# Altium PCB LM_HTR_001.PcbDoc
Units mm, origin at the board's own origin, x right, y up, seen from the top; angles counter-clockwise.
Board outline 60 x 70.1 mm, 4 copper layers (Top Layer, +5, +12, Bottom Layer), stack 0.778 mm thick; 41 components, 41 nets, 140 pads, 13 vias.
Unrouted connection lines stored in the file: 16.
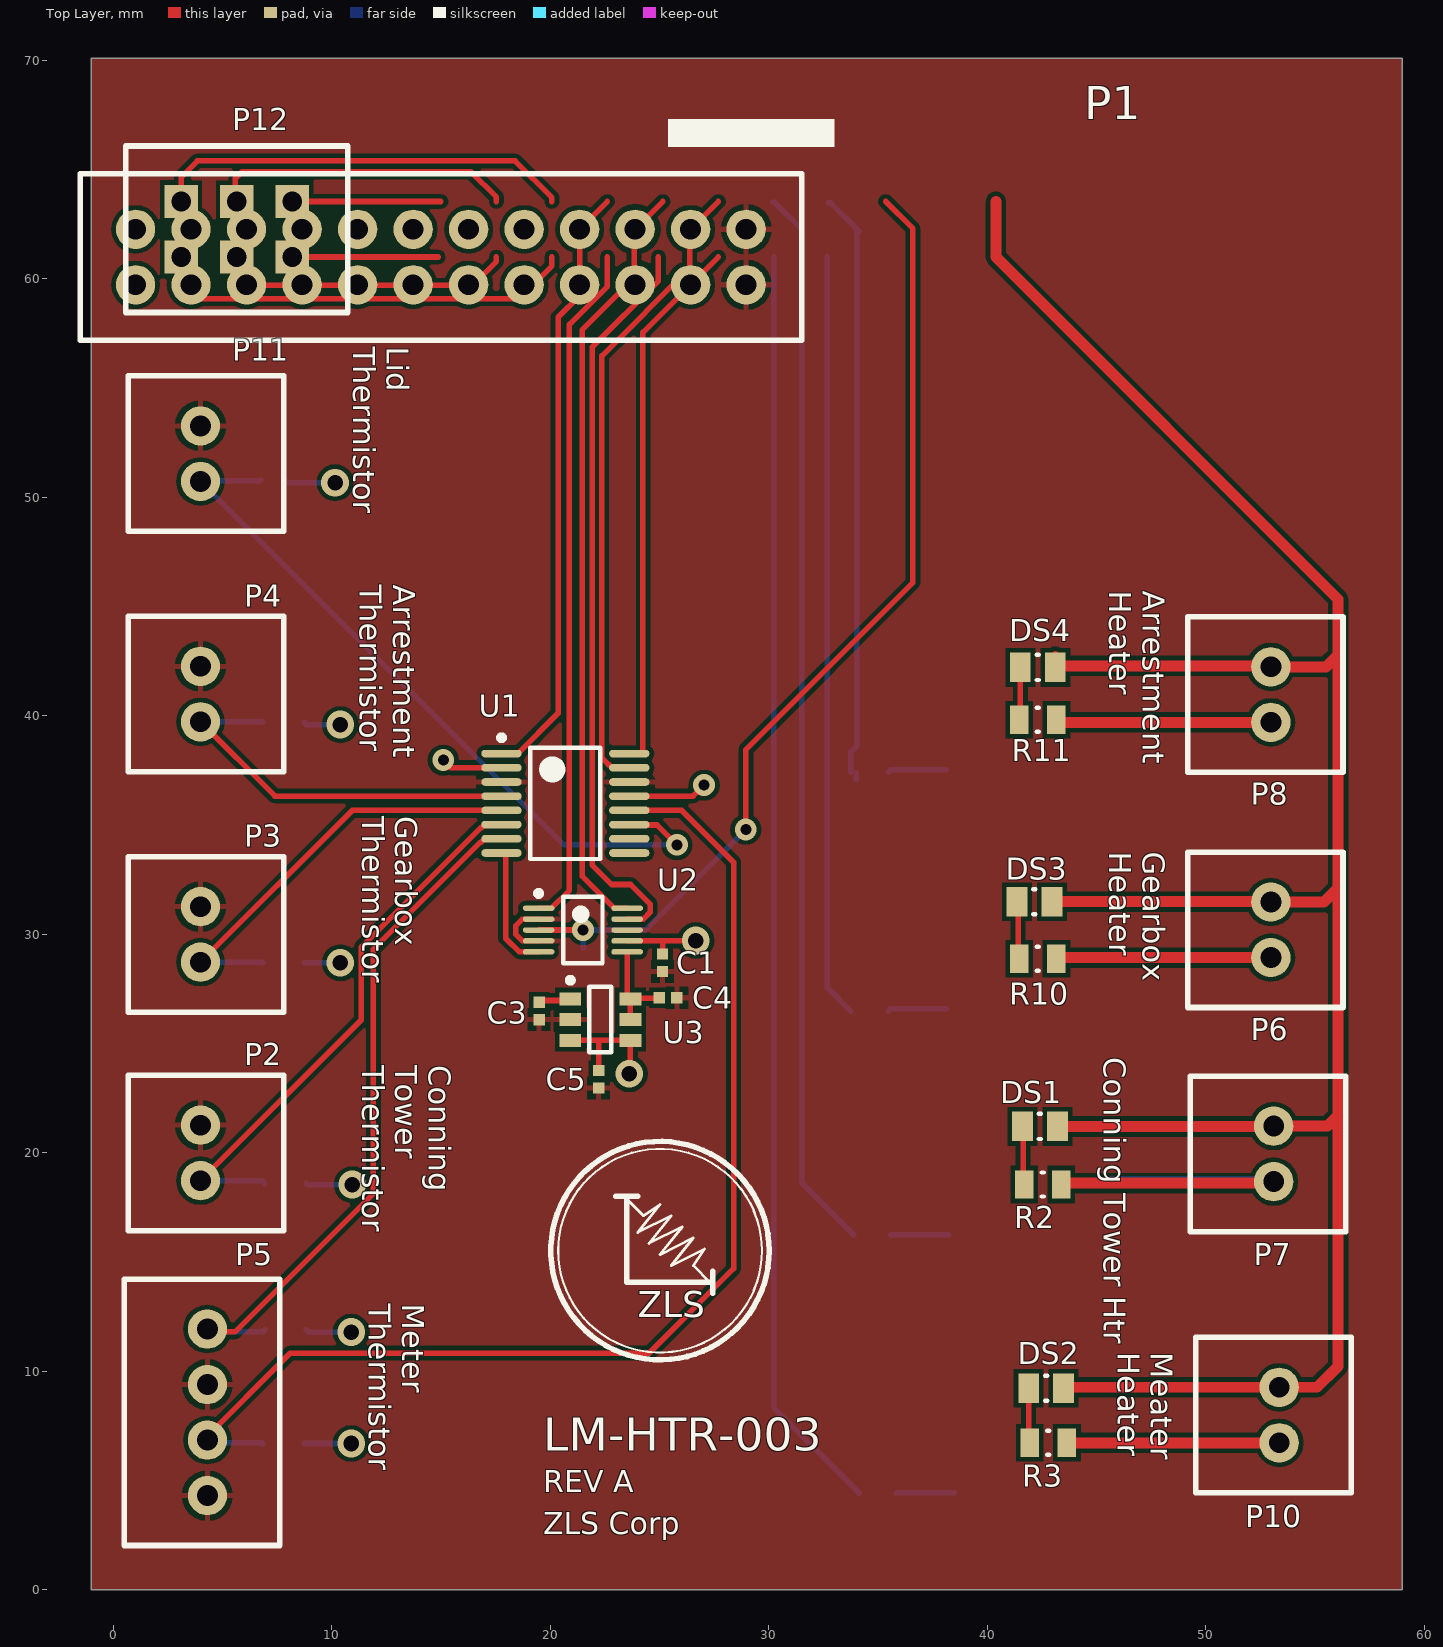
[diagram p0: Top Layer view]
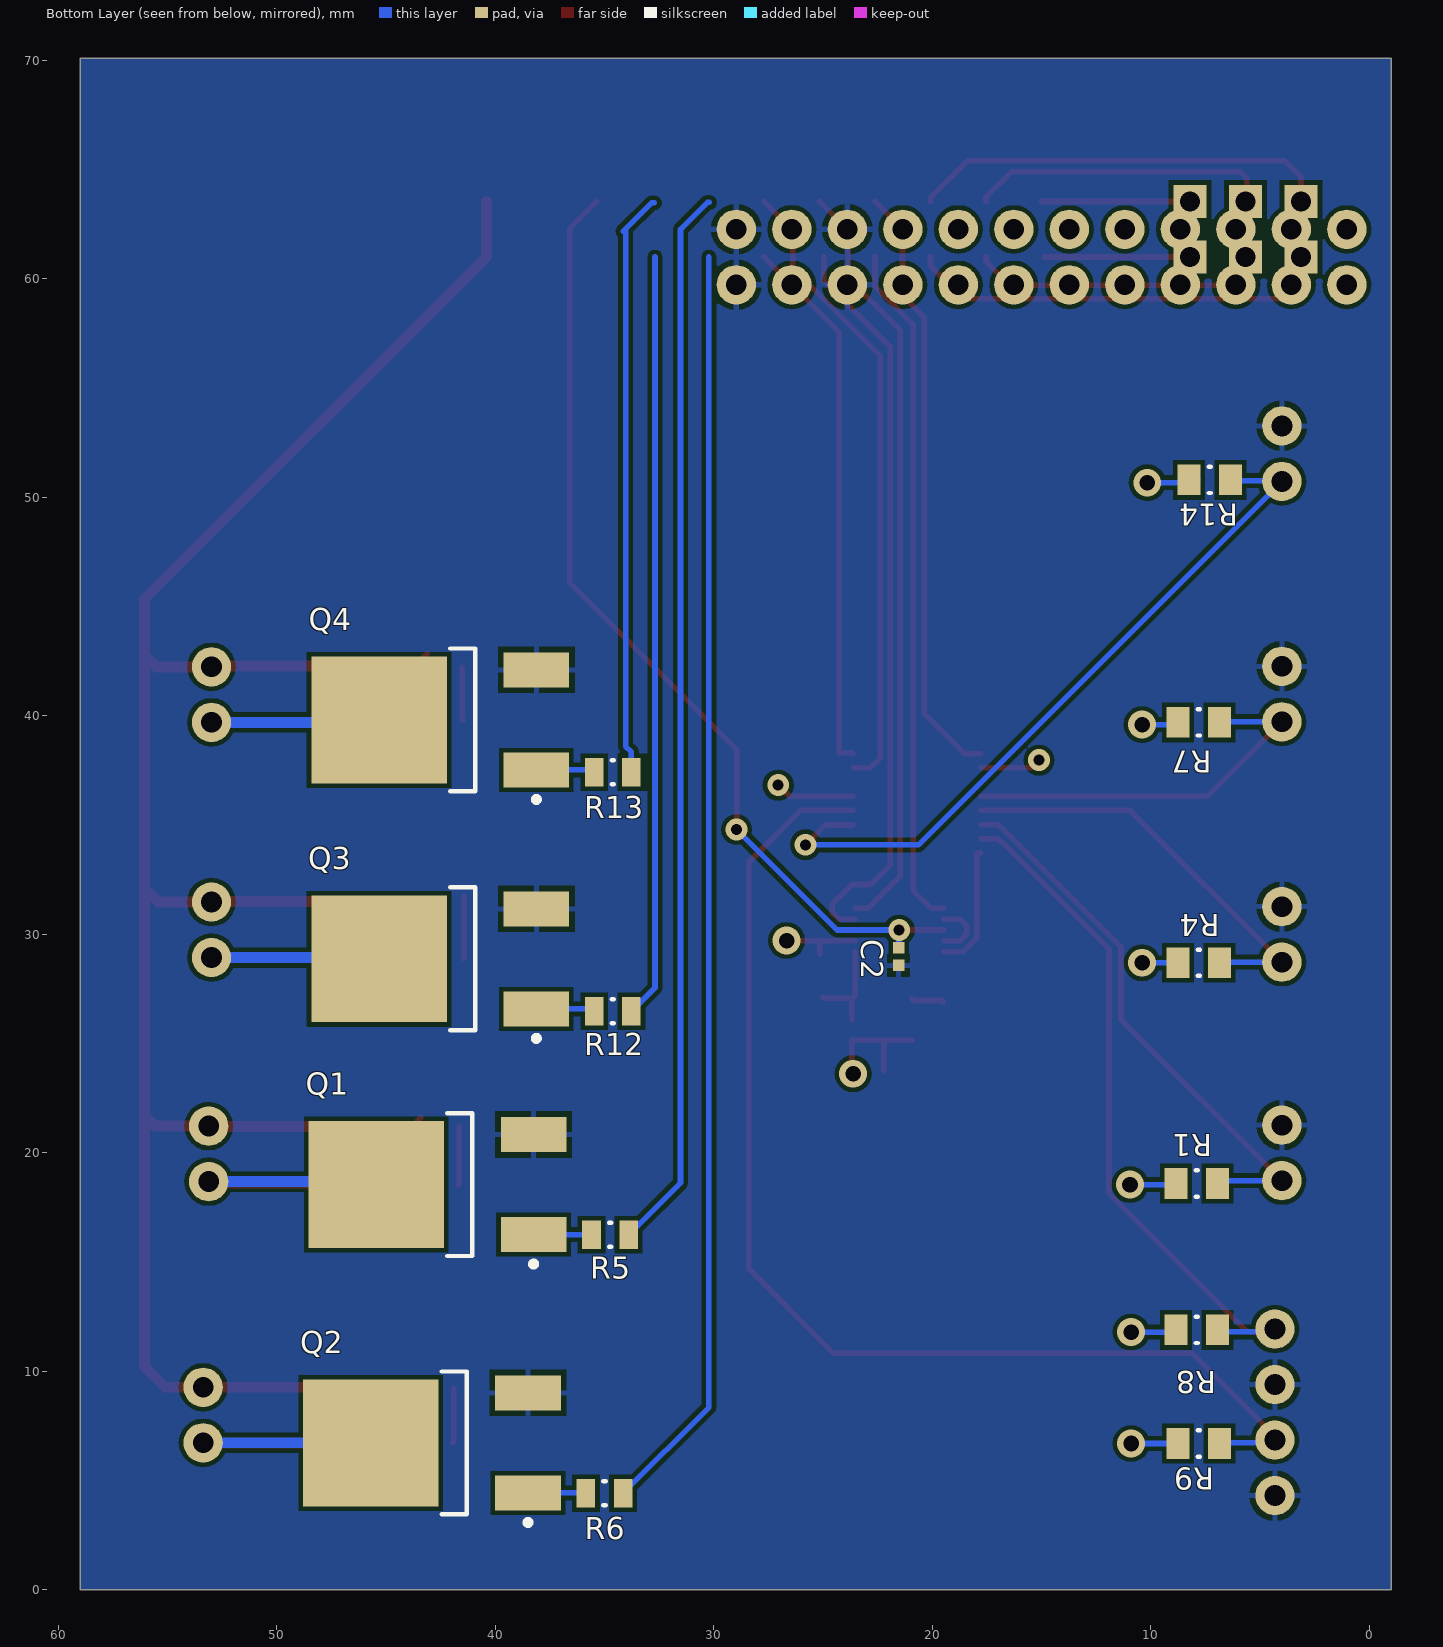
[diagram p1: Bottom Layer view, seen from below]
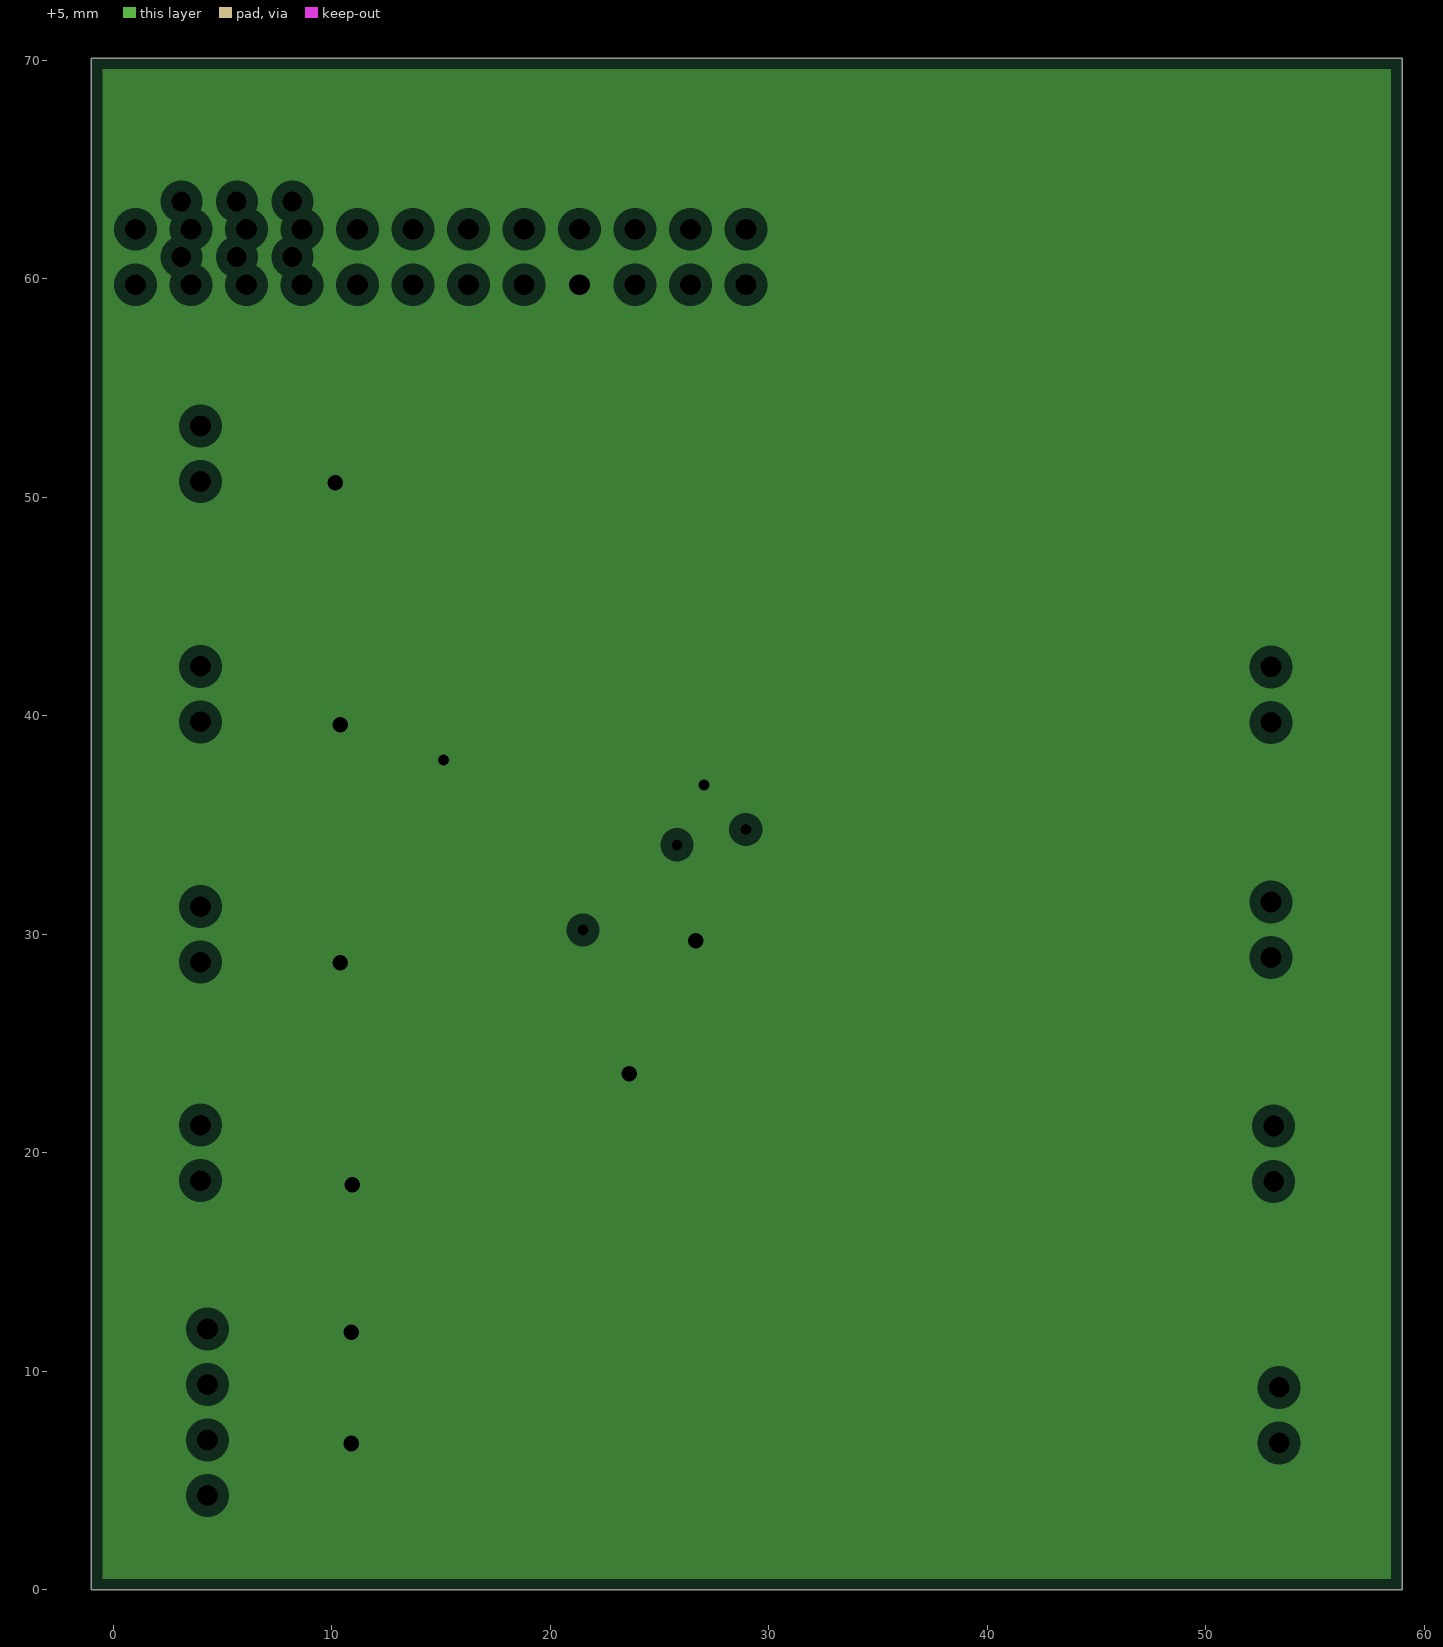
[diagram p2: +5, clearances drawn from the general rule]
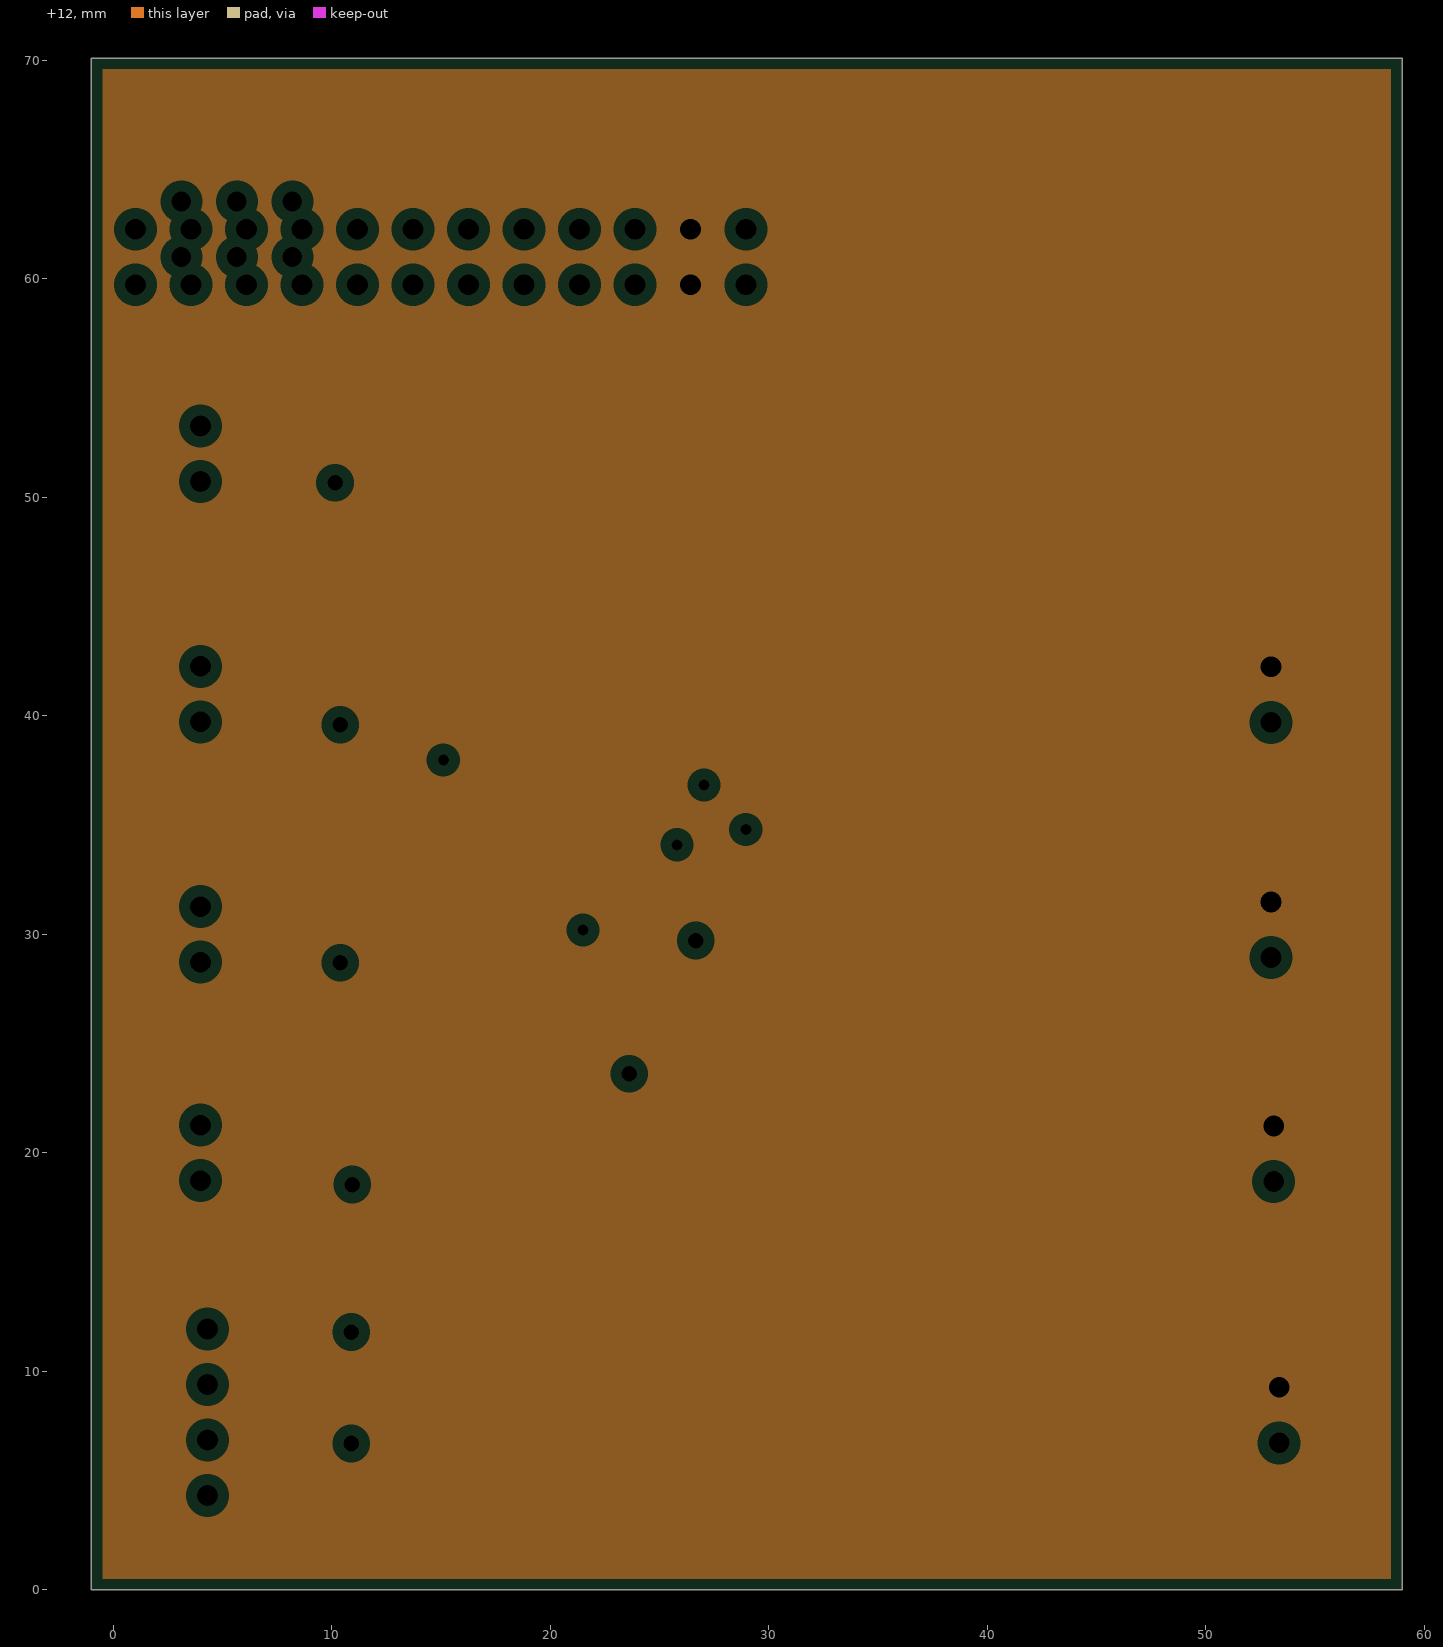
[diagram p3: +12, clearances drawn from the general rule]

## Layer stack, top to bottom
Top Solder: solder mask 0.0102, Solder Resist, Dk 3.5
Top Layer: signal copper 0.0356
Dielectric 1: core 0.254, FR-4, Dk 4.2
+5: plane copper 0.036, net +5
Dielectric 3: prepreg 0.127, Dk 4.2
+12: plane copper 0.036, net +12
Dielectric 2: core 0.254, Dk 4.2
Bottom Layer: signal copper 0.0356
Bottom Solder: solder mask 0.0102, Solder Resist, Dk 3.5

## Board outline
-1,0 59,0 59,70.104 -1,70.104

## Design rules (kind name [scope] priority, off if disabled: settings)
Clearance [All] p1: gap=0.2 ignorepadtopadclearanceinfootprint=FALSE
ComponentClearance [All] p1: gap=0 collisioncheckmode=3 verticalgap=0.254 showdistances=TRUE
MinimumSolderMaskSliver [All] p1: minsoldermaskwidth=0.045
PlaneClearance [All] p1: clearance=0.508
PlaneConnect [All] p1: planeconnectstyle=Relief reliefexpansion=0.508 reliefentries=4 reliefconductorwidth=0.254 reliefairgap=0.254
PolygonConnect [All] p1: connectstyle=Relief reliefconductorwidth=0.254 reliefentries=4 polygonreliefangle="90 Angle" airgapwidth=0.254
RoutingVias [All] p1: holewidth=0.711 width=1.27 viastyle="Through Hole" minholewidth=0.711 minwidth=1.27 maxholewidth=0.711 maxwidth=1.27
SilkToSilkClearance [All] p1: silktosilkclearance=0.127
SilkToSolderMaskClearance [IsPad] p1: minsilkscreentomaskgap=0.127 clearancetoexposedcopper=TRUE
SolderMaskExpansion [All] p1: expansion=0.102
Width [All] p1: maxlimit=0.762 minlimit=0.254 preferedwidth=0.254
24 further rules are at their usual default settings.

## Components (designator, comment, footprint, x,y, rotation, side; value= is the part's Value field where it differs from the comment)
C1 "0.1uF" CAPC0402(1005)60_L 25.146,28.702 r270 top
C2 "0.1uF" CAPC0402(1005)60_L 21.539,28.981 r270 bottom
C3 "0.1uF" CAPC0402(1005)60_L 19.5,26.5 r270 top
C4 "0.1uF" CAPC0402(1005)60_L 25.4,27.1 r180 top
C5 "0.1uF" CAPC0402(1005)60_L 22.225,23.368 r270 top
DS1 "Visible Name Value Type    False Description Lite-On LTST-S220KRKT Red LED, 631 nm 2012 (0805) Side View, Rectangle Lens SMD package STRING" 0805C_L 42.418,21.209 r180 top
DS2 "Visible Name Value Type    False Description Lite-On LTST-S220KRKT Red LED, 631 nm 2012 (0805) Side View, Rectangle Lens SMD package STRING" 0805C_L 42.7,9.228 r180 top
DS3 "Visible Name Value Type    False Description Lite-On LTST-S220KRKT Red LED, 631 nm 2012 (0805) Side View, Rectangle Lens SMD package STRING" 0805C_L 42.164,31.496 r180 top
DS4 "Visible Name Value Type    False Description Lite-On LTST-S220KRKT Red LED, 631 nm 2012 (0805) Side View, Rectangle Lens SMD package STRING" 0805C_L 42.319,42.216 r180 top
P1 "IPL1-112-01-F-S-K" IPL1-112-01-F-S-K 15,61 r0 top
P2 "IPL1-102-01-F-S-K" IPL1-102-01-F-S-K 4,20 r90 top
P3 "IPL1-102-01-F-S-K" IPL1-102-01-F-S-K 4,30 r90 top
P4 "IPL1-102-01-F-S-K" IPL1-102-01-F-S-K 4,41 r90 top
P5 "Header 4" IPL1-104-01-L-S-K 4.318,8.128 r270 top
P6 "IPL1-102-01-F-S-K" IPL1-102-01-F-S-K 52.986,30.211 r270 top
P7 "IPL1-102-01-F-S-K" IPL1-102-01-F-S-K 53.113,19.955 r270 top
P8 "IPL1-102-01-F-S-K" IPL1-102-01-F-S-K 52.986,40.974 r270 top
P10 "IPL1-102-01-F-S-K" IPL1-102-01-F-S-K 53.367,8.004 r270 top
P11 "IPL1-102-01-F-S-K" IPL1-102-01-F-S-K 4,52 r90 top
P12 "IPL1-103-01-F-D" IPL1-103-01-F-D 3.125,61 r0 top
Q1 "NTD4804NT4G" ONSC-DPAK-3-369AA-01_V 42.646,18.552 r0 bottom
Q2 "NTD4804NT4G" ONSC-DPAK-3-369AA-01_V 42.9,6.728 r0 bottom
Q3 "NTD4804NT4G" ONSC-DPAK-3-369AA-01_V 42.519,28.88 r0 bottom
Q4 "NTD4804NT4G" ONSC-DPAK-3-369AA-01_V 42.519,39.816 r0 bottom
R1 "6K98 1% 0805(2012)" RESC0805(2012)_N 7.9,18.6 r0 bottom
R2 "" RESC0805(2012)_L 42.546,18.552 r180 top
R3 "" RESC0805(2012)_L 42.8,6.728 r0 top
R4 "6K98 1% 0805(2012)" RESC0805(2012)_N 7.8,28.7 r0 bottom
R5 "" RESC0805(2012)_L 34.746,16.252 r0 bottom
R6 "" RESC0805(2012)_L 35,4.428 r0 bottom
R7 "6K98 1% 0805(2012)" RESC0805(2012)_N 7.8,39.7 r180 bottom
R8 "6K98 1% 0805(2012)" RESC0805(2012)_N 7.9,11.9 r180 bottom
R9 "6K98 1% 0805(2012)" RESC0805(2012)_N 7.8,6.7 r0 bottom
R10 "" RESC0805(2012)_L 42.319,28.88 r180 top
R11 "" RESC0805(2012)_L 42.319,39.816 r0 top
R12 "" RESC0805(2012)_L 34.619,26.48 r0 bottom
R13 "" RESC0805(2012)_L 34.619,37.416 r0 bottom
R14 "6K98 1% 0805(2012)" RESC0805(2012)_N 7.3,50.8 r180 bottom
U1 "ADG1608BRUZ" ADI-RU-16_M 20.7,36 r0 top
U2 "MAX11100EUB+T" U10+2_L 21.5,30.2 r0 top
U3 "MAX6070AAUT41+T" SOT95P280X445-6N 22.3,26.1 r0 top

## Footprints (in the part's own frame and the unit in brackets; to place one, negate y for a bottom-side part, rotate by r counter-clockwise, add the part's x,y. Pads: shape width x height; smd on the part's side, far side on the other; paste and mask are expansions set on the pad)
0805C_L [mm]
  rect 0.95x1.35 smd: 1(-0.8,0) 2(0.8,0)
  silkscreen extent -0.05,-0.58 0.05,0.58, body extent -1.1,-0.72 1.1,0.72, height 0.75
ADI-RU-16_M [mm] "SOP, 16-Leads, Body 5x4.4mm, Pitch 0.65mm, IPC Low Density"
  oval 1.85x0.35 smd: 1(-2.925,2.275) 2(-2.925,1.625) 3(-2.925,0.975) 4(-2.925,0.325) 5(-2.925,-0.325) 6(-2.925,-0.975) 7(-2.925,-1.625) 8(-2.925,-2.275) 9(2.925,-2.275) 10(2.925,-1.625) 11(2.925,-0.975) 12(2.925,-0.325) 13(2.925,0.325) 14(2.925,0.975) 15(2.925,1.625) 16(2.925,2.275)
  silkscreen extent -3.05,-2.55 1.6,3.12, body extent -2.25,-2.55 2.25,2.55, height 1.2
CAPC0402(1005)60_L [mm] "Chip Capacitor, Body 1.0x0.5mm, Height 0.6mm, IPC High Density"
  rect 0.52x0.52 smd: 1(-0.4,0) 2(0.4,0)
  body extent -0.55,-0.3 0.55,0.3, height 0.6
IPL1-102-01-F-S-K [mm]
  round 1.8 hole 0.95: 1(-1.27,0) 2(1.27,0)
  silkscreen extent -3.56,-3.81 3.56,3.3, body extent -3.3,-3.56 3.3,3.05, height 8.13
IPL1-103-01-F-D [mil]
  rect 60x60 hole 35.43: 1(0,0) 2(0,100) 3(100,0) 4(100,100) 5(200,0) 6(200,100)
  silkscreen extent -100,-100 300,200, body extent -100,-100 280,210, height 320
IPL1-104-01-L-S-K [mm]
  round 1.8 hole 0.95: 1(-3.81,0) 2(-1.27,0) 3(1.27,0) 4(3.81,0)
  silkscreen extent -6.1,-3.81 6.1,3.3, body extent -5.84,-3.3 5.84,3.3, height 8.13
IPL1-112-01-F-S-K [mm]
  round 1.8 hole 0.95: 1(-13.97,-1.27) 2(-13.97,1.27) 3(-11.43,-1.27) 4(-11.43,1.27) 5(-8.89,-1.27) 6(-8.89,1.27) 7(-6.35,-1.27) 8(-6.35,1.27) 9(-3.81,-1.27) 10(-3.81,1.27) 11(-1.27,-1.27) 12(-1.27,1.27) 13(1.27,-1.27) 14(1.27,1.27) 15(3.81,-1.27) 16(3.81,1.27) 17(6.35,-1.27) 18(6.35,1.27) 19(8.89,-1.27) 20(8.89,1.27) 21(11.43,-1.27) 22(11.43,1.27) 23(13.97,-1.27) 24(13.97,1.27)
  silkscreen extent -16.51,-3.81 16.51,3.81, body extent -15.95,-4.32 16.05,3.56, height 8.13
ONSC-DPAK-3-369AA-01_V [mm] "DPAK, 3-Leads, Body 6.54x6.095mm, Pitch 2.29mm"
  rect 3x1.6 smd: 1(-4.4,2.29) 3(-4.4,-2.29)
  rect 6.2x5.8 smd: 4(2.8,0)
  silkscreen extent -4.52,-3.27 -0.45,3.76, body extent -1.6,-3.27 4.49,3.27, height 2.47
RESC0805(2012)_L [mm] "Chip Resistor, Body 2.0x1.3mm, IPC High Density"
  rect 0.85x1.3 smd: 1(-0.85,0) 2(0.85,0)
  silkscreen extent -0.05,-0.55 0.05,0.55, body extent -1.1,-0.67 1.1,0.68, height 0.7
RESC0805(2012)_N [mm] "Chip Resistor, Body 2.0x1.3mm, IPC Medium Density"
  rect 1.05x1.4 smd: 1(-0.95,0) 2(0.95,0)
  silkscreen extent -0.05,-0.6 0.05,0.6, body extent -1.1,-0.67 1.1,0.68, height 0.7
SOT95P280X445-6N [mm] "SOT23, 6-Leads, Body 2.90x2.80mm, Pitch 0.95mm, IPC Medium Density"
  rect 1x0.6 smd: 1(-1.375,0.95) 2(-1.375,0) 3(-1.375,-0.95) 4(1.375,-0.95) 5(1.375,0) 6(1.375,0.95)
  silkscreen extent -1.5,-1.5 0.5,1.92, body extent -1.5,-1.5 1.5,1.5, height 4.45
U10+2_L [mm] "TSSOP, 10-Leads, Body 3x3mm, Pitch 0.5mm, IPC High Density"
  oval 1.45x0.25 smd: 1(-2.025,1) 2(-2.025,0.5) 3(-2.025,0) 4(-2.025,-0.5) 5(-2.025,-1) 6(2.025,-1) 7(2.025,-0.5) 8(2.025,0) 9(2.025,0.5) 10(2.025,1)
  silkscreen extent -2.15,-1.52 0.9,1.8, body extent -1.55,-1.55 1.55,1.55, height 1.1

## Part data
C1 C2 C3 C4 C5: library part CMP-1034-00252-1, "CAP CER 0.1UF 10V X7R 0402", Manufacturer="Murata Electronics North America", Manufacturer Part Number=GRM155R71A104KA01D, Operating Temperature="-55°C ~ 125°C", Package / Case="0402 (1005 Metric)", Ratings=-, Supplier Part Number 1=490-6321-1-ND, Temperature Coefficient=X7R, Tolerance=±10%, Voltage - Rated=10V, Applications="General Purpose", Category=Capacitors, ComponentLink1Description=http://www.murata.com/~/media/webrenewal/support/library/catalog/products/capacitor/mlcc/c02e.ashx?la=en-us, ComponentLink1URL=http://www.murata.com/~/media/webrenewal/support/library/catalog/products/capacitor/mlcc/c02e.ashx?la=en-us, Features=-, Height - Seated (Max)=-, Lead Spacing=-, Mounting Type="Surface Mount, MLCC", Packaging="Cut Tape (CT)", Part Status=Active, Pricing 1="1=0.1, 10=0.014, 100=0.0063, 500=0.00446, 1000=0.00351, 2500=0.00319, 5000=0.00293 (USD)", RoHS="RoHS Compliant", Size / Dimension="0.039\" L x 0.020\" W (1.00mm x 0.50mm)", Stock 1=2920395, Supplier 1=Digi-Key, Thickness (Max)="0.022\" (0.55mm)"
DS1 DS2 DS3 DS4: library part "LED A/K", Case/Package=0805, Case Code (Metric)=2012, Colour=Red, Forward Current=20mA, Forward Voltage=2V, Lens Colour=Colorless, Manufacturer="Vishay / Lite-On", Manufacturer Part Number=LTST-S220KRKT, Max Operating Temperature=85°C, Min Operating Temperature=-55°C, Package Quantity=4000, Power Dissipation=75mW, Supplier Part Number 1=160-1469-1-ND, Case Code (Imperial)=0805, ComponentLink1Description=https://datasheet.ciiva.com/2110/s-110-ltst-s220krkt-2110132.pdf, ComponentLink1URL=https://datasheet.ciiva.com/2110/s-110-ltst-s220krkt-2110132.pdf, ComponentLink2Description=https://datasheet.ciiva.com/2110/s-110-ltst-s220krkt-2110133.pdf, ComponentLink2URL=https://datasheet.ciiva.com/2110/s-110-ltst-s220krkt-2110133.pdf, ComponentLink3Description=https://datasheet.ciiva.com/2110/s-110-ltst-s220krkt-2110134.pdf, ComponentLink3URL=https://datasheet.ciiva.com/2110/s-110-ltst-s220krkt-2110134.pdf, ComponentLink4Description=https://datasheet.ciiva.com/12403/lite-on-ltst-s220krkt-187389-12403798.pdf, ComponentLink4URL=https://datasheet.ciiva.com/12403/lite-on-ltst-s220krkt-187389-12403798.pdf, ComponentLink5Description=https://datasheet.ciiva.com/16345/lite-onltst-s220krkt-16345511.pdf, ComponentLink5URL=https://datasheet.ciiva.com/16345/lite-onltst-s220krkt-16345511.pdf, ComponentLink6Description=https://datasheet.ciiva.com/15118/getdatasheetpartid-225752-15118120.pdf, ComponentLink6URL=https://datasheet.ciiva.com/15118/getdatasheetpartid-225752-15118120.pdf, ComponentLink7Description=https://datasheet.ciiva.com/14633/0900766b80dc0b76-14633737.pdf, ComponentLink7URL=https://datasheet.ciiva.com/14633/0900766b80dc0b76-14633737.pdf, ComponentLink8Description=https://datasheet.ciiva.com/11775/0900766b80dc0b76-11775439.pdf, ComponentLink8URL=https://datasheet.ciiva.com/11775/0900766b80dc0b76-11775439.pdf, Depth=0.6mm, Dominant Wavelength=631nm, Height=0.6mm, Illumination Colour=Red, Lead Free="Lead Free", Length=2.1mm, Lens Style=Diffused,Colorless, Lens Transparency=Clear, Luminous Intensity=54mcd, Mount="Surface Mount", Number of Elements=1, Number of LEDs=1, Number of Pins=2, Packaging="Tape and Reel", Power Rating=75mW, Pricing 1="1=0.31, 10=0.225, 25=0.1656, 100=0.1183, 250=0.0804, 500=0.071, 1000=0.0556 (USD)", Radiation Hardening=No, Stock 1=108191, Supplier 1=Digi-Key, Test Current=20mA, Viewing Angle=130°, Wavelength=639nm, Width=1mm
P1: "IPL1-112-01-F-D-K", Supplier Part Number 1=08W3504, Supplier 1=Newark
P2 P3 P4 P6 P7 P8 P10 P11: ".100 TERMINAL ASSEMBLY", Current Rating=-, Insulation Color=Natural, Manufacturer="Samtec Inc.", Material Flammability Rating="UL94 V-0", Operating Temperature="-55°C ~ 125°C", Supplier Part Number 1=IPL1-102-01-F-S-K-ND, Voltage Rating="675VAC, 954VDC", Applications=-, Category="Connectors, Interconnects", ComponentLink1Description=http://suddendocs.samtec.com/prints/ipl1-1xx-xx-xxx-s-xx-x-xx-mkt.pdf, ComponentLink1URL=http://suddendocs.samtec.com/prints/ipl1-1xx-xx-xxx-s-xx-x-xx-mkt.pdf, Connector Type=Header, Contact Finish - Mating=Gold, Contact Finish - Post=Tin, Contact Finish Thickness - Mating="3µin (0.08µm)", Contact Finish Thickness - Post=-, Contact Length - Mating="0.215\" (5.46mm)", Contact Length - Post="0.120\" (3.05mm)", Contact Material="Phosphor Bronze", Contact Shape=Square, Contact Type="Male Pin", Fastening Type="Locking Ramp", Features=-, Ingress Protection=-, Insulation Height="0.320\" (8.13mm)", Insulation Material="Liquid Crystal Polymer (LCP)", Manufacturer Part Number=IPL1-102-01-F-S-K, Mated Stacking Heights=-, Mounting Type="Through Hole", Number of Positions=2, Number of Positions Loaded=All, Number of Rows=1, Overall Contact Length=-, Packaging=Tube, Part Status=Active, Pitch - Mating="0.100\" (2.54mm)", Pricing 1="1=1.69 (USD)", RoHS="RoHS Compliant", Row Spacing - Mating=-, Shrouding="Shrouded - 4 Wall", Stock 1=0, Style="Board to Cable/Wire", Supplier 1=Digi-Key, Termination=Solder
P5: "Header, 4-Pin", LatestRevisionDate=17-Jul-2002, LatestRevisionNote="Re-released for DXP Platform.", Publisher="Altium Limited"
P12: Manufacturer=SAMTEC, Manufacturer Part Number=IPL1-103-01-F-D-K, Supplier Part Number 1=51P2678, ComponentLink1Description=https://webassistants.partcommunity.com/23d-libs/samtec/search/resolve.html?EMAIL=mysamtec@samtec.com&PN=HTSW-114-05-F-D, ComponentLink1URL=https://webassistants.partcommunity.com/23d-libs/samtec/search/resolve.html?EMAIL=mysamtec@samtec.com&PN=HTSW-114-05-F-D, Pricing 1="1=1.8, 5000=1.56, 10000=1.46 (USD)", Stock 1=0, Supplier 1=Newark
Q1 Q2 Q3 Q4: library part CMP-1058-00341-1, "Power MOSFET, 30 V, 117 A, Single N-Channel, 3-Pin DPAK, Pb-Free, Tape and Reel", Manufacturer="On Semiconductor", Package Type=DPAK-3, Supplier Part Number 1=NTD4804NT4GOSDKR-ND, Channel Polarity="N Channel", Ciss Typ (pF)=4490, ComponentLink1Description="Manufacturer URL", ComponentLink1URL=http://www.onsemi.com/, ComponentLink2Description=Datasheet, ComponentLink2URL=http://www.onsemi.cn/pub_link/Collateral/NTD4804N-D.PDF, ComponentLink3Description="Package Specification", ComponentLink3URL=http://www.onsemi.cn/pub_link/Collateral/369AA.PDF, Configuration=Single, Coss Typ (pF)=952, Crss Typ (pF)=556, DatasheetVersion="Rev. 8", ID Max (A)=117, Mounting Technology="Surface Mount", PackageDescription="3-Pin Flange Mount, Body 6.54 x 6.095 mm, Pitch 2.29 mm", PackageReference=DPAK-3-369AA-01, PackageVersion="Rev. B, 06/2010", Packing="Tape and Reel", PartNumber=NTD4804NT4G, Qrr Typ (nC)=30, RoHS=Pb-Free, Supplier 1=Digi-Key, V(BR)DSS Min (V)=30, VGS(th) Max (V)=2.5, VGS Max (V)=20
R1 R4 R7 R8 R9 R14: library part CMP-1013-00606-1, "6K98 0.125W 1% 0805 (2012 Metric)  SMD", Manufacturer="Vishay Dale", Manufacturer Part Number=CRCW08056K98FKEA, Operating Temperature="-55°C ~ 155°C", Package / Case="0805 (2012 Metric)", Power (Watts)="0.125W, 1/8W", Resistance (Ohms)=6.98k, Supplier Device Package=0805, Supplier Part Number 1=541-6.98KCCT-ND, Temperature Coefficient=±100ppm/°C, Tolerance=±1%, Category=Resistors, ComponentLink1Description=http://www.vishay.com/docs/20035/dcrcwe3.pdf, ComponentLink1URL=http://www.vishay.com/docs/20035/dcrcwe3.pdf, Composition="Thick Film", Failure Rate=-, Features="Automotive AEC-Q200", Height - Seated (Max)="0.020\" (0.50mm)", Packaging="Cut Tape (CT)", Part Status=Active, Pricing 1="1=0.1, 10=0.044, 100=0.0178, 1000=0.00802, 2500=0.00696 (USD)", RoHS="RoHS Compliant", Size / Dimension="0.079\" L x 0.049\" W (2.00mm x 1.25mm)", Stock 1=34245, Supplier 1=Digi-Key
R2 R3 R10 R11: library part CMP-1013-00393-1, Manufacturer="Vishay Dale", Manufacturer Part Number=CRCW08054K99FKEA, Operating Temperature="-55°C ~ 155°C", Package / Case="0805 (2012 Metric)", Power (Watts)="0.125W, 1/8W", Resistance (Ohms)=4.99k, Supplier Device Package=0805, Supplier Part Number 1=541-4.99KCCT-ND, Temperature Coefficient=±100ppm/°C, Tolerance=±1%, Category=Resistors, ComponentLink1Description=http://www.vishay.com/docs/20035/dcrcwe3.pdf, ComponentLink1URL=http://www.vishay.com/docs/20035/dcrcwe3.pdf, Composition="Thick Film", Failure Rate=-, Features="Automotive AEC-Q200", Height - Seated (Max)="0.020\" (0.50mm)", Packaging="Cut Tape (CT)", Part Status=Active, Pricing 1="1=0.1, 10=0.044, 100=0.0178, 1000=0.00802, 2500=0.00696 (USD)", RoHS="RoHS Compliant", Size / Dimension="0.079\" L x 0.049\" W (2.00mm x 1.25mm)", Stock 1=93740, Supplier 1=Digi-Key
R5 R6 R12 R13: library part CMP-1013-00393-1, Manufacturer="Vishay Dale", Manufacturer Part Number=CRCW080575R0FKEA, Operating Temperature="-55°C ~ 155°C", Package / Case="0805 (2012 Metric)", Power (Watts)="0.125W, 1/8W", Resistance (Ohms)=75, Supplier Device Package=0805, Supplier Part Number 1=541-75.0CCT-ND, Temperature Coefficient=±100ppm/°C, Tolerance=±1%, Category=Resistors, ComponentLink1Description=http://www.vishay.com/docs/20035/dcrcwe3.pdf, ComponentLink1URL=http://www.vishay.com/docs/20035/dcrcwe3.pdf, Composition="Thick Film", Failure Rate=-, Features="Automotive AEC-Q200", Height - Seated (Max)="0.020\" (0.50mm)", Packaging="Cut Tape (CT)", Part Status=Active, Pricing 1="1=0.1, 10=0.044, 100=0.0178, 1000=0.00802, 2500=0.00696 (USD)", RoHS="RoHS Compliant", Size / Dimension="0.079\" L x 0.049\" W (2.00mm x 1.25mm)", Stock 1=32546, Supplier 1=Digi-Key
U1: library part CMP-0793-00136-1, "4.5 Ohm Ron, 8-Channel +/-5 V,+12 V, +5 V and +3.3 V Multiplexer, 16-pin SOP (RU-16), Tube", Manufacturer="Analog Devices", Bandwidth (Hz)="40M, 40M, 37M, 34M", Code_JEDEC=MO-153AB, ComponentLink1Description="Manufacturer URL", ComponentLink1URL=http://www.analog.com/en/index.html, ComponentLink2Description=Datasheet, ComponentLink2URL=http://www.analog.com/static/imported-files/data_sheets/ADG1608_1609.pdf, ComponentLink3Description="Package Specification", ComponentLink3URL=http:/www.analog.com/static/imported-files/packages/36244347913743854010197452789RU16.pdf, DatasheetVersion="Rev. 0", Max Analog Signal Range="0 to Vdd", Mounting Technology="Surface Mount", PackageDescription="16-Pin Thin Shrink Small Outline Package, Body 5 x 4.4 mm, Pitch 0.65 mm", PackageReference=RU-16, PackageVersion=Nov-02, Packing=Tube, PartNumber=ADG1608BRUZ, Ron (ohms)=4.4, t transition (s)=150n
U2: library part CMP-0249-00017-1, "16-Bit, +5V, 200ksps ADC with 10uA Shutdown, 10-Pin uMAX, -40°C to +85°C, Pb-Free, Tape and Reel", Code_JEDEC=MO-187-BA, ComponentLink1Description="Manufacturer URL", ComponentLink1URL=http://www.maxim-ic.com, ComponentLink2Description=Datasheet, ComponentLink2URL=http://datasheets.maxim-ic.com/en/ds/MAX11100.pdf, ComponentLink3Description="Package Specification", ComponentLink3URL=http://pdfserv.maxim-ic.com/package_dwgs/21-0061.PDF, DatasheetVersion="Rev 1, Jan-2012", PackageDescription="10-Pin Micro-MAX Thin Shrink Small Outline (uSOP), 3 x 3 x 0.85 mm Body, 0.5 mm Pitch, Pb-Free", PackageReference=U10+2, PackageVersion="revL, 2008"
U3: "IC VREF SERIES 4.096V SOT23", Current - Supply=350µA, Manufacturer="Maxim Integrated", Operating Temperature="-40°C ~ 125°C (TA)", Package / Case=SOT-23-6, Supplier Part Number 1=MAX6070AAUT41+TCT-ND, Temperature Coefficient=6ppm/°C, Tolerance=±0.04%, Voltage - Input="4.3 V ~ 5.5 V", Voltage - Output (Min/Fixed)=4.096V, Category="Integrated Circuits (ICs)", ComponentLink1Description=https://datasheets.maximintegrated.com/en/ds/MAX6070-MAX6071.pdf, ComponentLink1URL=https://datasheets.maximintegrated.com/en/ds/MAX6070-MAX6071.pdf, Manufacturer Part Number=MAX6070AAUT41+T, Mounting Type="Surface Mount", Noise - 0.1Hz to 10Hz=9.6µVp-p, Noise - 10Hz to 10kHz=9µVrms, Output Type=Fixed, Packaging="Cut Tape (CT)", Part Status=Active, Pricing 1="1=3.41, 10=3.213, 25=2.5704, 50=2.4418, 100=2.2491, 250=2.13344, 500=2.05634 (USD)", Reference Type=Series, RoHS="RoHS Compliant", Stock 1=2623, Supplier 1=Digi-Key, Supplier Device Package=SOT-23-6

## Via types
v1: diameter 1.27, hole 0.711, Top Layer to Bottom Layer, 8 vias
v2: diameter 1, hole 0.5, Top Layer to Bottom Layer, 5 vias

## Nets (pads, with @x,y where several pads share a name; then routed paths per layer and width w, separated by ;. In a path a pad name is that pad's centre, name@x,y a point inside that pad or via, vN(x,y) a via of type N, cw(c..) or ccw(c..) an arc to the next point about the centre after c; other vN are vias at no path point)
+3.3: C2.1 P1.18 U2.3 | length 44.6
  Top Layer w0.254: U2.3 v2(21.514,30.201) ; v2(28.956,34.798) 28.956,38.459 36.6,46.103 36.6,62.3 35.36,63.54
  Bottom Layer w0.254: C2.1 21.526,29.394 21.526,30.188 v2(21.514,30.201) 24.359,30.201 v2(28.956,34.798)
+5: C1.1 C5.1 P1.17 R1.2 R4.2 R7.1 R8.1 R9.2 R14.1 U1.2 U1.13 U2.7 U3.3 U3.4 | length 27.7
  Top Layer w0.254: v2(15.113,37.973) 15.461,37.625 U1.2 ; U3.3 22.3,25.15 ; C5.1 22.225,25.075 22.3,25.15 ; U2.7 23.527,29.702 25.146,29.702 ; v1(23.622,23.622) 23.675,23.675 U3.4 22.3,25.15 ; U1.13 26.54,36.325 27.045,36.83 v2(27.051,36.83) ; C1.1 25.146,29.702 ; v1(26.67,29.718) 26.654,29.702 25.146,29.702
  Bottom Layer w0.254: R14.1@7.85,50.8 7.977,50.673 v1(10.16,50.673) ; R9.2 v1(10.9,6.7) ; R4.2 v1(10.4,28.7) ; R7.1 8.85,39.6 v1(10.4,39.6) ; R8.1 8.95,11.8 10.5,11.8 v1@10.6,11.9 ; R1.2 8.9,18.55 v1(10.95,18.55)
  other v1: 10.9,11.8
+12: DS1.1 DS2.1 DS3.1 DS4.1 P1.21 P1.22 P6.1 P7.1 P8.1 P10.1 | length 112.9
  Top Layer w0.254: DS4.1@43.119,42.851 43.679,42.291 ; DS1.1@43.421,21.608 43.566,21.463 DS1.1@43.566,21.209 ; DS2.1 DS2.1@43.546,9.274
  Top Layer w0.5: 40.4,63.54 40.4,61 56.061,45.339 56.061,42.799 ; DS3.1 P6.1@53.113,31.496 ; DS2.1@43.546,9.274 P10.1 55.102,9.274 56.061,10.233 56.061,21.717 ; DS1.1@43.566,21.209 52.578,21.209 P7.1@52.832,21.463 ; 43.679,42.291 52.398,42.291 P8.1@52.986,42.879 ; P6.1 55.411,31.481 56.061,32.131 ; P8.1 55.506,42.244 56.061,42.799 ; P7.1 55.569,21.225 56.061,21.717 ; 56.061,21.717 56.061,32.131 ; 56.061,32.131 56.061,42.799
"ADC REF": C4.2 U2.6 U3.5 U3.6 | length 4.5
  Top Layer w0.254: U2.6 23.525,27.2 U3.6 ; U3.5 U3.6 ; C4.2 24.975,27.075 23.7,27.075 U3.6
Analog_Mux_Out: U1.8 U2.5 | length 5.8
  Top Layer w0.254: U1.8 17.925,33.725 17.969,33.681 17.969,29.825 18.592,29.202 19.473,29.202 U2.5
"Arrestment Heater FET": P1.16 R13.1 | length 27.2
  Bottom Layer w0.254: 32.72,63.48 32.84,63.48 34.15,62.17 ; R13.1 33.769,38.341 34.036,38.608 34.036,62.17 ; R13.1@34.019,37.076 R13.1@34.019,37.391
"Arrestment Htr Out": P8.2 Q4.4 R11.2 | length 17.2
  Top Layer w0.254: R11.2 R11.2@43.281,39.704
  Top Layer w0.5: R11.2@43.281,39.704 P8.2
  Bottom Layer w0.5: Q4.4@45.631,39.704 P8.2
"Arrestment Thermistor": P4.1 R7.2 U1.4 | length 18
  Top Layer w0.254: P4.1 7.405,36.325 U1.4
  Bottom Layer w0.254: P4.1 6.82,39.73 R7.2
"Conning Tower FET": P1.14 R5.1 | length 48.8
  Bottom Layer w0.254: 30.2,63.5 30.28,63.5 31.521,62.259 31.521,18.627 R5.1
"Conning Tower Htr Out": P7.2 Q1.4 R2.1 | length 17.3
  Top Layer w0.254: R2.1 R2.1@43.529,18.685
  Top Layer w0.5: R2.1@43.529,18.685 43.529,18.66 43.571,18.619 53.046,18.619 P7.2
  Bottom Layer w0.5: Q1.4@45.679,18.685 P7.2
"Conning Tower Thermistor": P2.1 R1.1 U1.6 | length 25.5
  Top Layer w0.254: P2.1 11.362,26.092 11.362,29.422 16.817,34.877 16.851,34.877 16.999,35.025 U1.6
  Bottom Layer w0.254: P2.1 6.82,18.73 R1.1
Cross_Green: P1.3 P12.3 | length 13.7
  Top Layer w0.254: P12.3@5.6,60.98 5.6,59.94 5.84,59.7 16.444,59.7 17.54,60.796 17.54,61
Cross_Orange: P1.1 P12.5 | length 6.7
  Top Layer w0.254: P12.5 14.875,61
Cross_Yellow: P1.5 P12.1 | length 19.4
  Top Layer w0.254: P12.1 3.125,59.875 3.9,59.1 18.587,59.1 20.08,60.593 20.08,61
"Gearbox Heater FET": P1.15 R12.1 | length 35
  Bottom Layer w0.254: 32.69,61 32.69,27.559 R12.1
"Gearbox Htr Out": P6.2 Q3.4 R10.1 | length 17.5
  Top Layer w0.254: R10.1 R10.1@43.23,28.941
  Top Layer w0.5: R10.1@43.23,28.941 P6.2
  Bottom Layer w0.254: Q3.4 Q3.4@45.38,28.941
  Bottom Layer w0.5: Q3.4@45.38,28.941 P6.2
"Gearbox Thermistor": P3.1 R4.1 U1.5 | length 19.5
  Top Layer w0.254: P3.1 10.945,35.675 U1.5
  Bottom Layer w0.254: P3.1 6.82,28.73 R4.1
GND: C1.2 C2.2 C3.2 C4.1 C5.2 P1.19 P1.20 P1.23 P1.24 P2.2 P3.2 P4.2 P5.2 P5.4 P11.2 Q1.3 Q2.3 Q3.3 Q4.3 U1.3 U1.14 U2.2 U2.4 U2.8 U3.2 | length 2.7
  Top Layer w0.254: U2.4 19.473,29.702 18.734,29.702 18.423,30.013 18.423,30.387 18.734,30.698 19.473,30.698 U2.2
"Lid Thermistor": P11.1 R14.2 U1.11 | length 34
  Top Layer w0.254: U1.11 23.643,35.007 24.893,35.007 v2(25.8,34.1)
  Bottom Layer w0.254: R14.2@6.75,50.8 6.715,50.765 4.035,50.765 P11.1 20.63,34.1 v2(25.8,34.1)
Long_Green: P1.4 P12.4 | length 13.8
  Top Layer w0.254: P12.4@5.6,63.58 5.6,64.6 5.9,64.9 16.38,64.9 17.54,63.74 17.54,63.54
Long_Orange: P1.2 P12.6 | length 6.8
  Top Layer w0.254: P12.6 15,63.54
Long_Yellow: P1.6 P12.2 | length 19.3
  Top Layer w0.254: P12.2 3.125,64.665 3.86,65.4 18.4,65.4 20.08,63.72 20.08,63.54
"Meter Heater FET": P1.13 R6.1 | length 58.2
  Bottom Layer w0.254: 30.226,61 30.226,8.352 R6.1
"Meter Thermistor 1": P5.3 R9.1 U1.12 | length 54.9
  Top Layer w0.254: P5.3@4,6.73 8.108,10.838 24.538,10.838 28.4,14.7 28.4,33.3 26.025,35.675 U1.12
  Bottom Layer w0.254: P5.3@4,6.73 6.82,6.73 R9.1
"Meter Thermistor 2": P5.1 R8.2 U1.7 | length 32.7
  Top Layer w0.254: P5.1@4,11.81 5.57,11.81 11.912,18.152 11.912,29.322 16.817,34.227 16.851,34.227 16.999,34.375 U1.7
  Bottom Layer w0.254: P5.1@4,11.81 6.86,11.81 R8.2
METER_HTR_OUT: P10.2 Q2.4 R3.2 | length 17.4
  Top Layer w0.254: R3.2 R3.2@43.656,6.734
  Top Layer w0.5: R3.2@43.656,6.734 43.659,6.731 53.364,6.731 P10.2
  Bottom Layer w0.254: Q2.4 Q2.4@45.706,6.734
  Bottom Layer w0.5: Q2.4@45.706,6.734 P10.2
"MUX A2": P1.12 U1.15 | length 29.1
  Top Layer w0.254: U1.15 22.849,37.625 22.701,37.773 22.667,37.773 22.373,38.067 22.373,56.478 26.387,60.492 26.387,62.227 27.7,63.54
MUX_A0: P1.8 U1.1 | length 27.7
  Top Layer w0.254: U1.1 18.525,38.275 20.371,40.121 20.371,58.242 21.361,59.233 21.361,62.281 22.62,63.54
MUX_A1: P1.11 U1.16 | length 24.8
  Top Layer w0.254: U1.16 23.669,38.319 24.248,38.319 24.248,57.548 27.7,61
NetC3_1: C3.1 U3.1 | length 1.5
  Top Layer w0.254: C3.1 19.575,26.975 20.85,26.975 U3.1
NetDS1_2: DS1.2 R2.2 | length 2.7
  Top Layer w0.254: DS1.2@41.646,21.209 41.646,18.602 R2.2
NetDS2_2: DS2.2 R3.1 | length 2.5
  Top Layer w0.254: DS2.2 41.9,6.778 R3.1
NetDS3_2: DS3.2 R10.2 | length 2.9
  Top Layer w0.254: DS3.2@41.419,31.75 41.419,28.93 R10.2
NetDS4_2: DS4.2 R11.1 | length 2.4
  Top Layer w0.254: R11.1 41.519,39.866 DS4.2
NetQ1_1: Q1.1 R5.2 | length 2.7
  Bottom Layer w0.254: R5.2 35.606,16.262 Q1.1
NetQ2_1: Q2.1 R6.2 | length 2.7
  Bottom Layer w0.254: R6.2 35.86,4.438 Q2.1
NetQ3_1: Q3.1 R12.2 | length 2.7
  Bottom Layer w0.254: R12.2 35.579,26.59 Q3.1
NetQ4_1: Q4.1 R13.2 | length 2.7
  Bottom Layer w0.254: R13.2 35.579,37.526 Q4.1
SPI0_MISO: P1.7 U2.1 | length 31.5
  Top Layer w0.254: U2.1 20.071,31.2 20.879,32.008 20.879,57.912 22.62,59.653 22.62,61
SPI0_SCLK: P1.10 U2.10 | length 35.1
  Top Layer w0.254: U2.10 22.929,31.2 21.465,32.664 21.465,57.66 23.847,60.042 23.847,62.227 25.16,63.54
Thermistor_CS0: P1.9 U2.9 | length 34
  Top Layer w0.254: U2.9 23.527,30.702 24.266,30.702 24.577,31.013 24.577,31.387 23.68,32.284 22.816,32.284 21.919,33.181 21.919,56.869 24.957,59.908 24.957,61
pads on no net: U1.9 U1.10

## Polygon pours and split planes (outlines as drawn)
GND on Top Layer "Top_GND" (solid, pour order 1): -1,70.104 59,70.104 59,0 -1,0
GND on Bottom Layer "Bottom_GND" (solid, pour order 0): -1,0 59,0 59,70.104 -1,70.104
+5 on +5 (split plane): 58.49,0.51 -0.49,0.51 -0.49,69.594 58.49,69.594
+12 on +12 (split plane): 58.49,0.51 -0.49,0.51 -0.49,69.594 58.49,69.594

## Silkscreen, mask and mechanical layers (free items; w line width, h text height)
Top Overlay:
  circle w0.1: c25.032,15.525 r4.663
  circle w0.254: c25.032,15.525 r5
  rectangle: 25.4,66.04 33.02,67.31
  lines w0.127: 23.508,17.887 24.27,17.125 25.032,17.633 24.016,16.363 25.54,17.125 24.524,15.855 26.048,16.617 25.032,15.347 26.556,16.109 25.54,14.839 27.064,15.601 26.556,14.839 27.318,14.077
  lines w0.254: 23,18.014 24.016,18.014 ; 23.508,17.887 23.508,14.077 27.318,14.077 ; 27.445,13.569 27.445,14.585
  text "Lid / Thermistor" at 11,56.9 h1.02 r270
  text "Arrestment / Thermistor" at 11.3,46 h1.02 r270
  text "Arrestment / Heater" at 45.593,45.72 h1.02 r270
  text "Gearbox / Thermistor" at 11.4,35.4 h1.02 r270
  text "Gearbox / Heater" at 45.593,33.782 h1.02 r270
  text "Conning Tower Htr" at 45.339,24.384 h1.02 r270
  text "Conning / Tower / Thermistor" at 11.4,24 h1.02 r270
  text "Meter / Thermistor" at 11.7,13.1 h1.02 r270
  text "ZLS" at 24.016,12.477 h1.2
  text "Meater / Heater" at 45.974,10.877 h1.02 r270
  text "LM-HTR-003" at 19.697,6.364 h1.52
  text "REV A" at 19.697,4.459 h1
  text "ZLS Corp" at 19.697,2.554 h1

## Dimensions
59,0 to -1,0 on Mechanical 1
-1,0 to -1,70.104 on Mechanical 1